# Altium PCB Mach do dong routed.PcbDoc (part 1 of 2)
Units mm, origin at the board's own origin, x right, y up, seen from the top; angles counter-clockwise.
Board outline 79.99 x 80 mm, 4 copper layers (Top Layer, Int1 (GND), Int2 (PWR), Bottom Layer), stack 1.566 mm thick; 97 components, 75 nets, 365 pads, 457 vias.
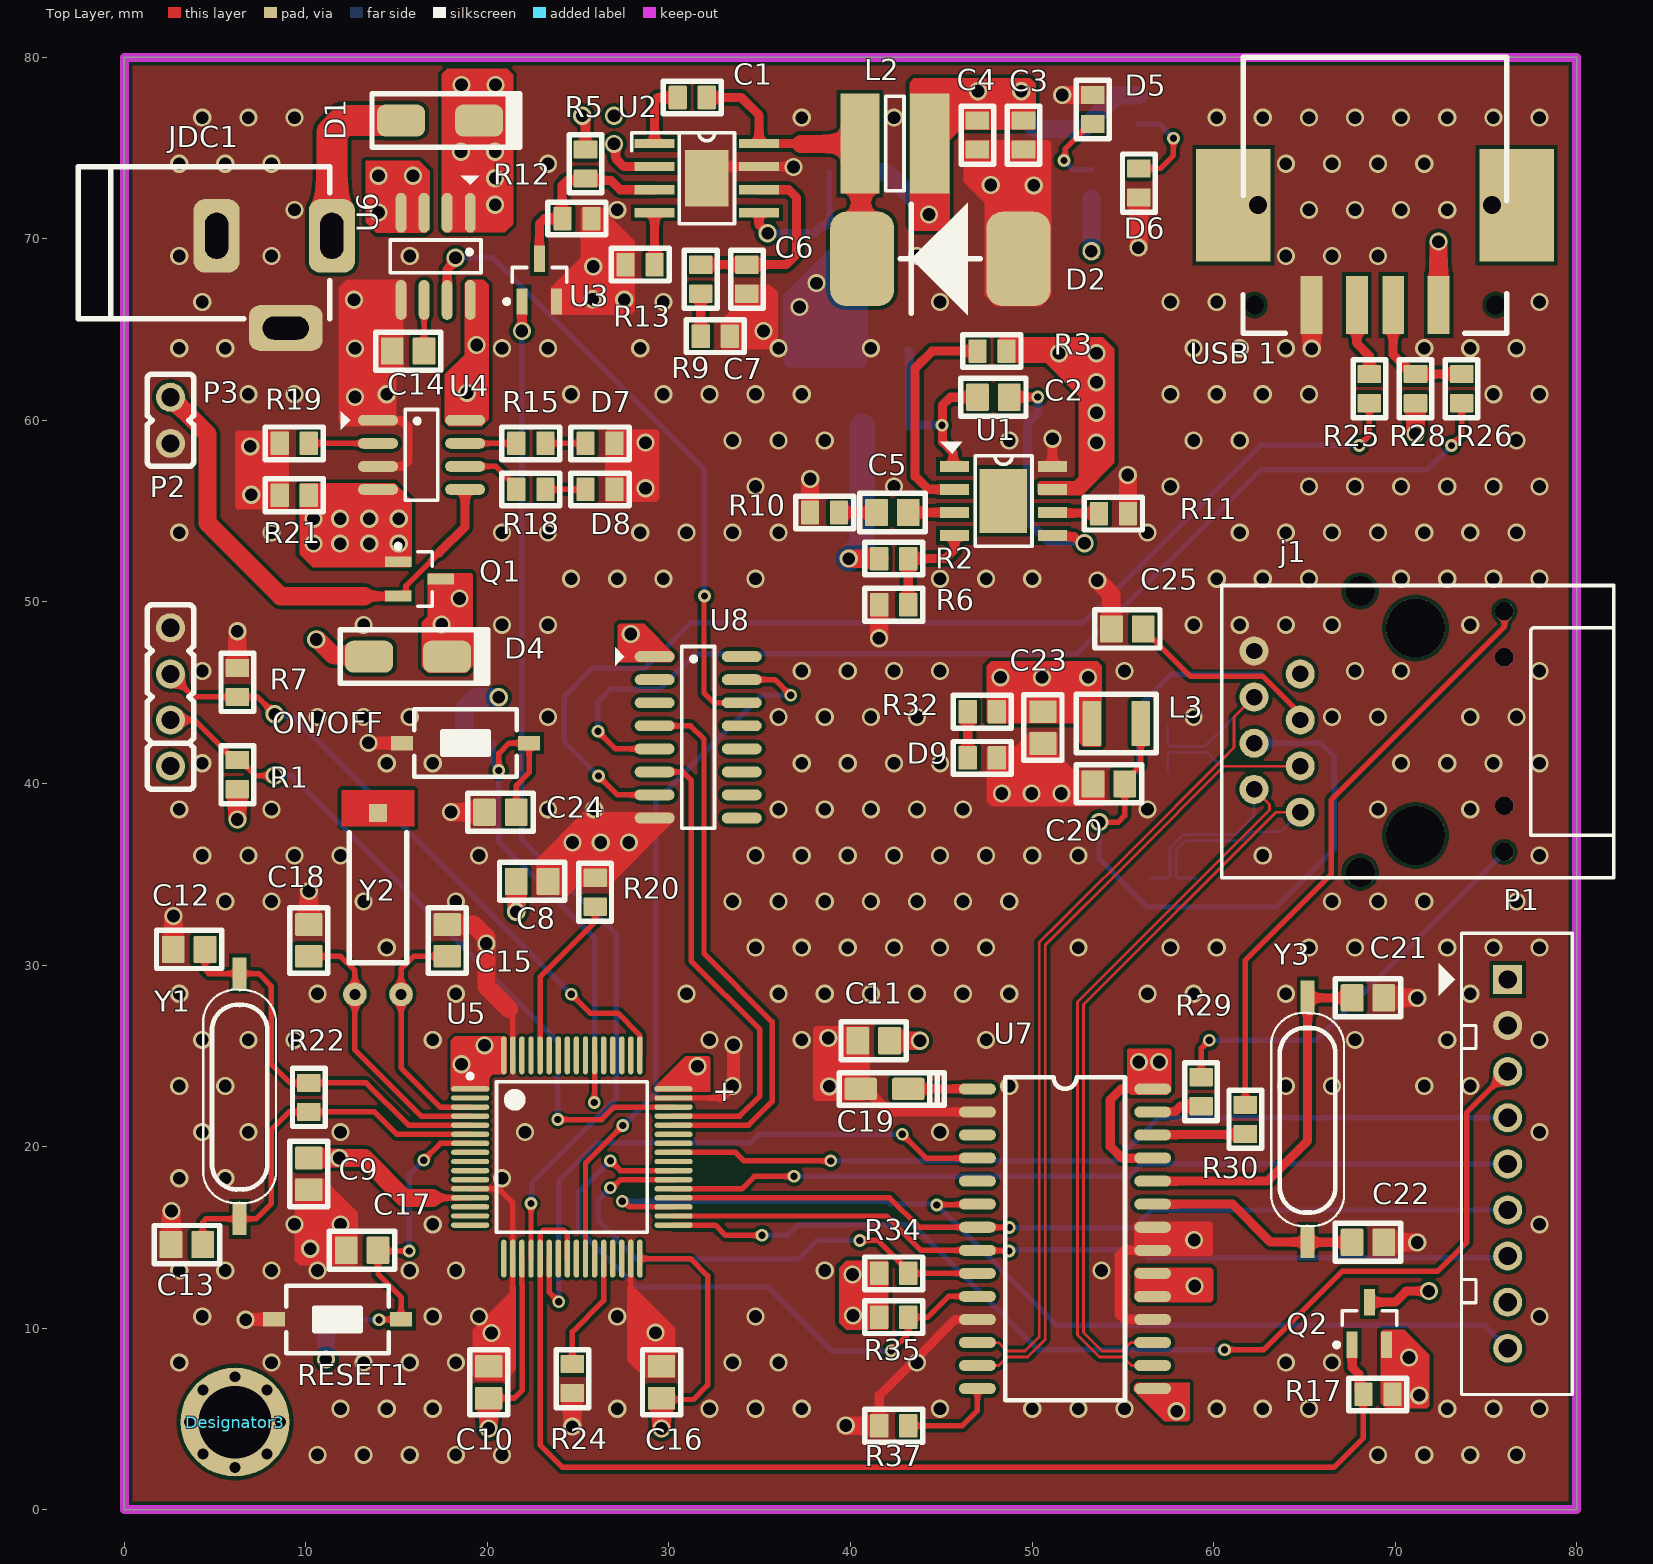
[diagram p0: Top Layer view]
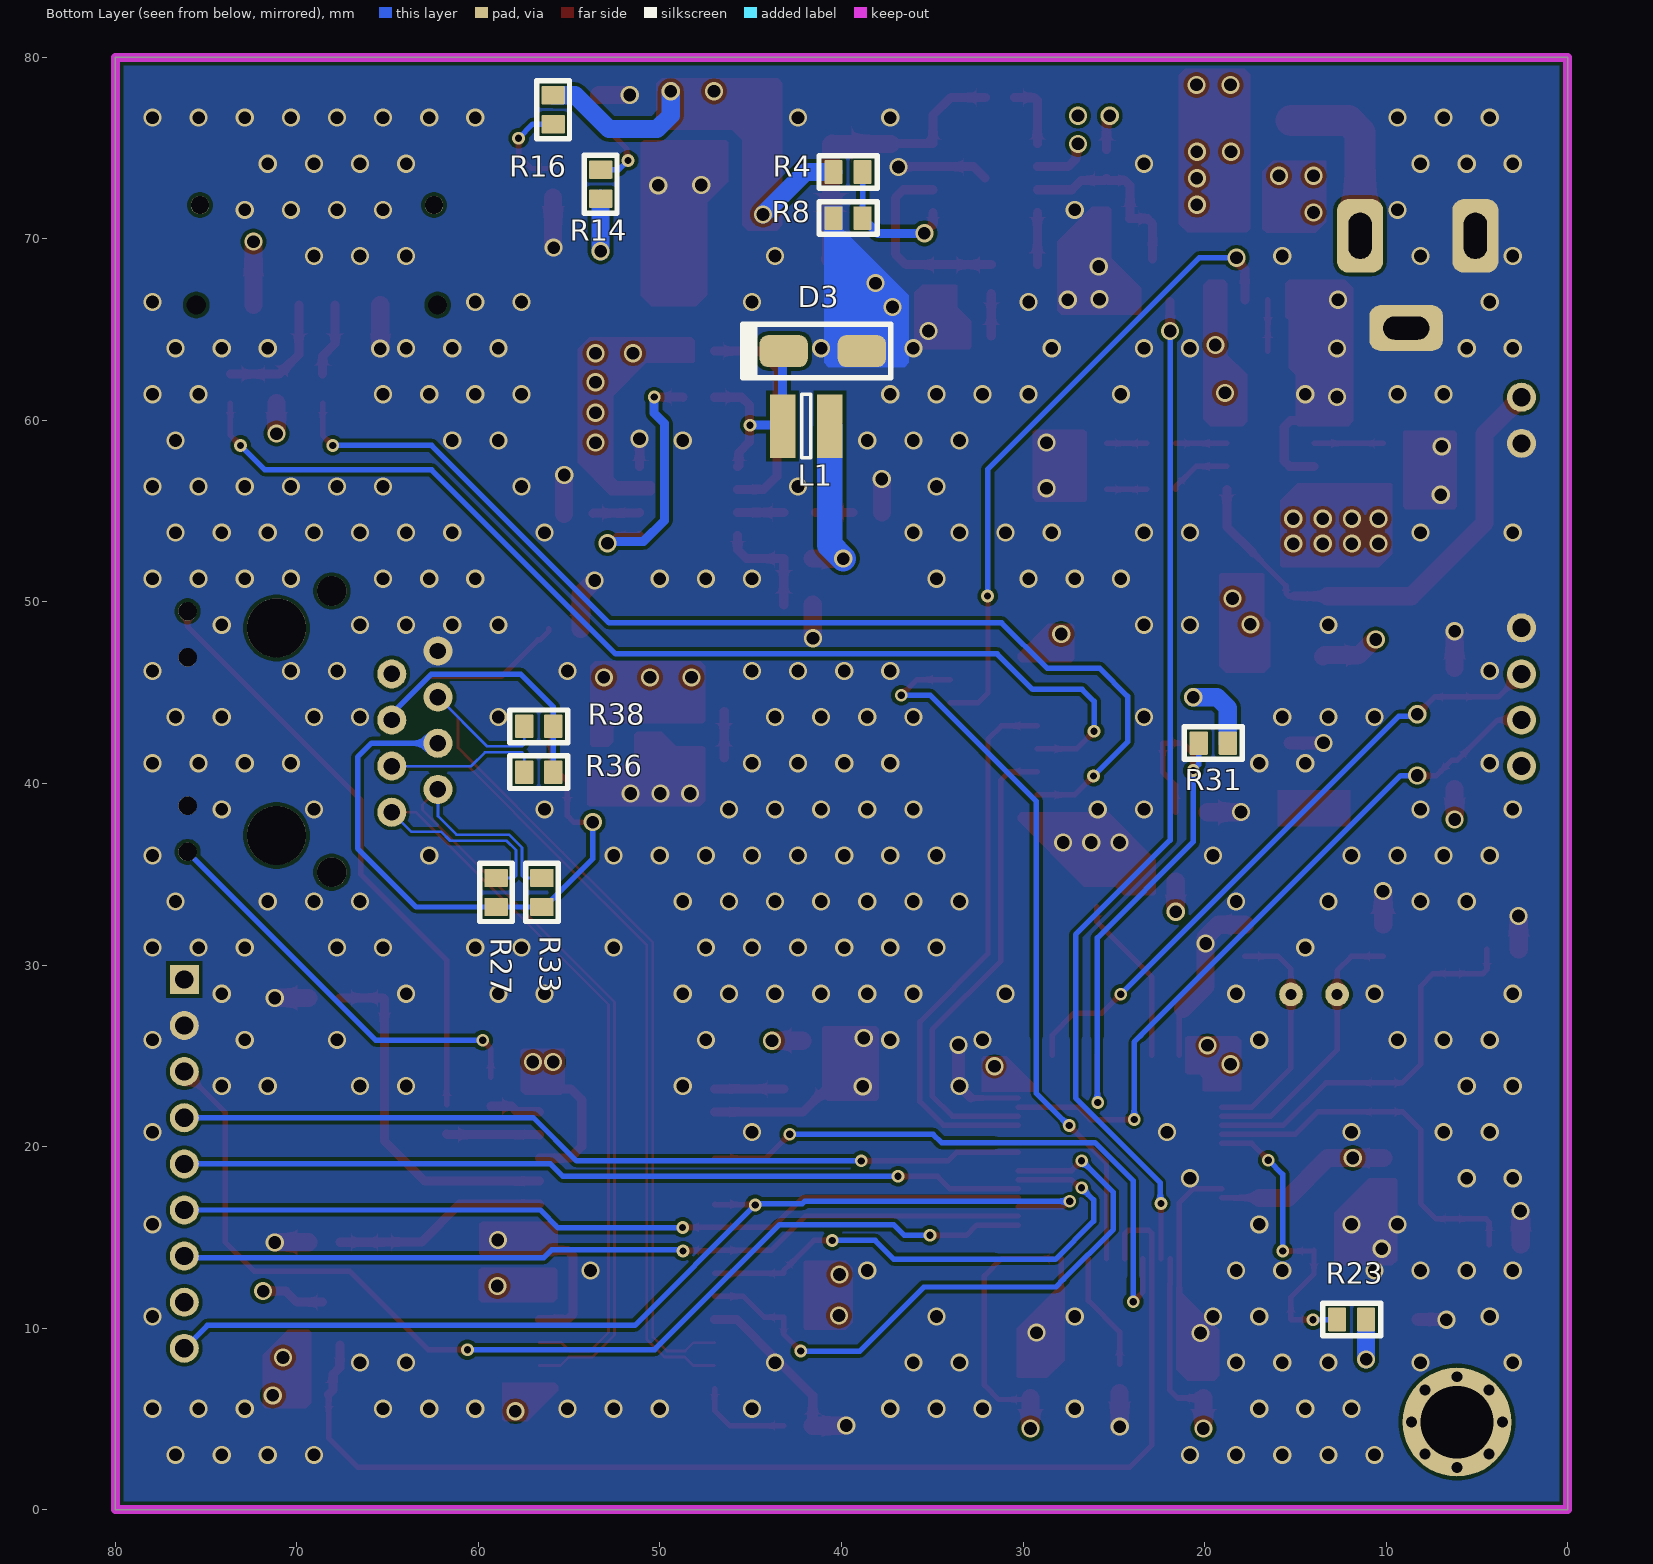
[diagram p1: Bottom Layer view, seen from below]
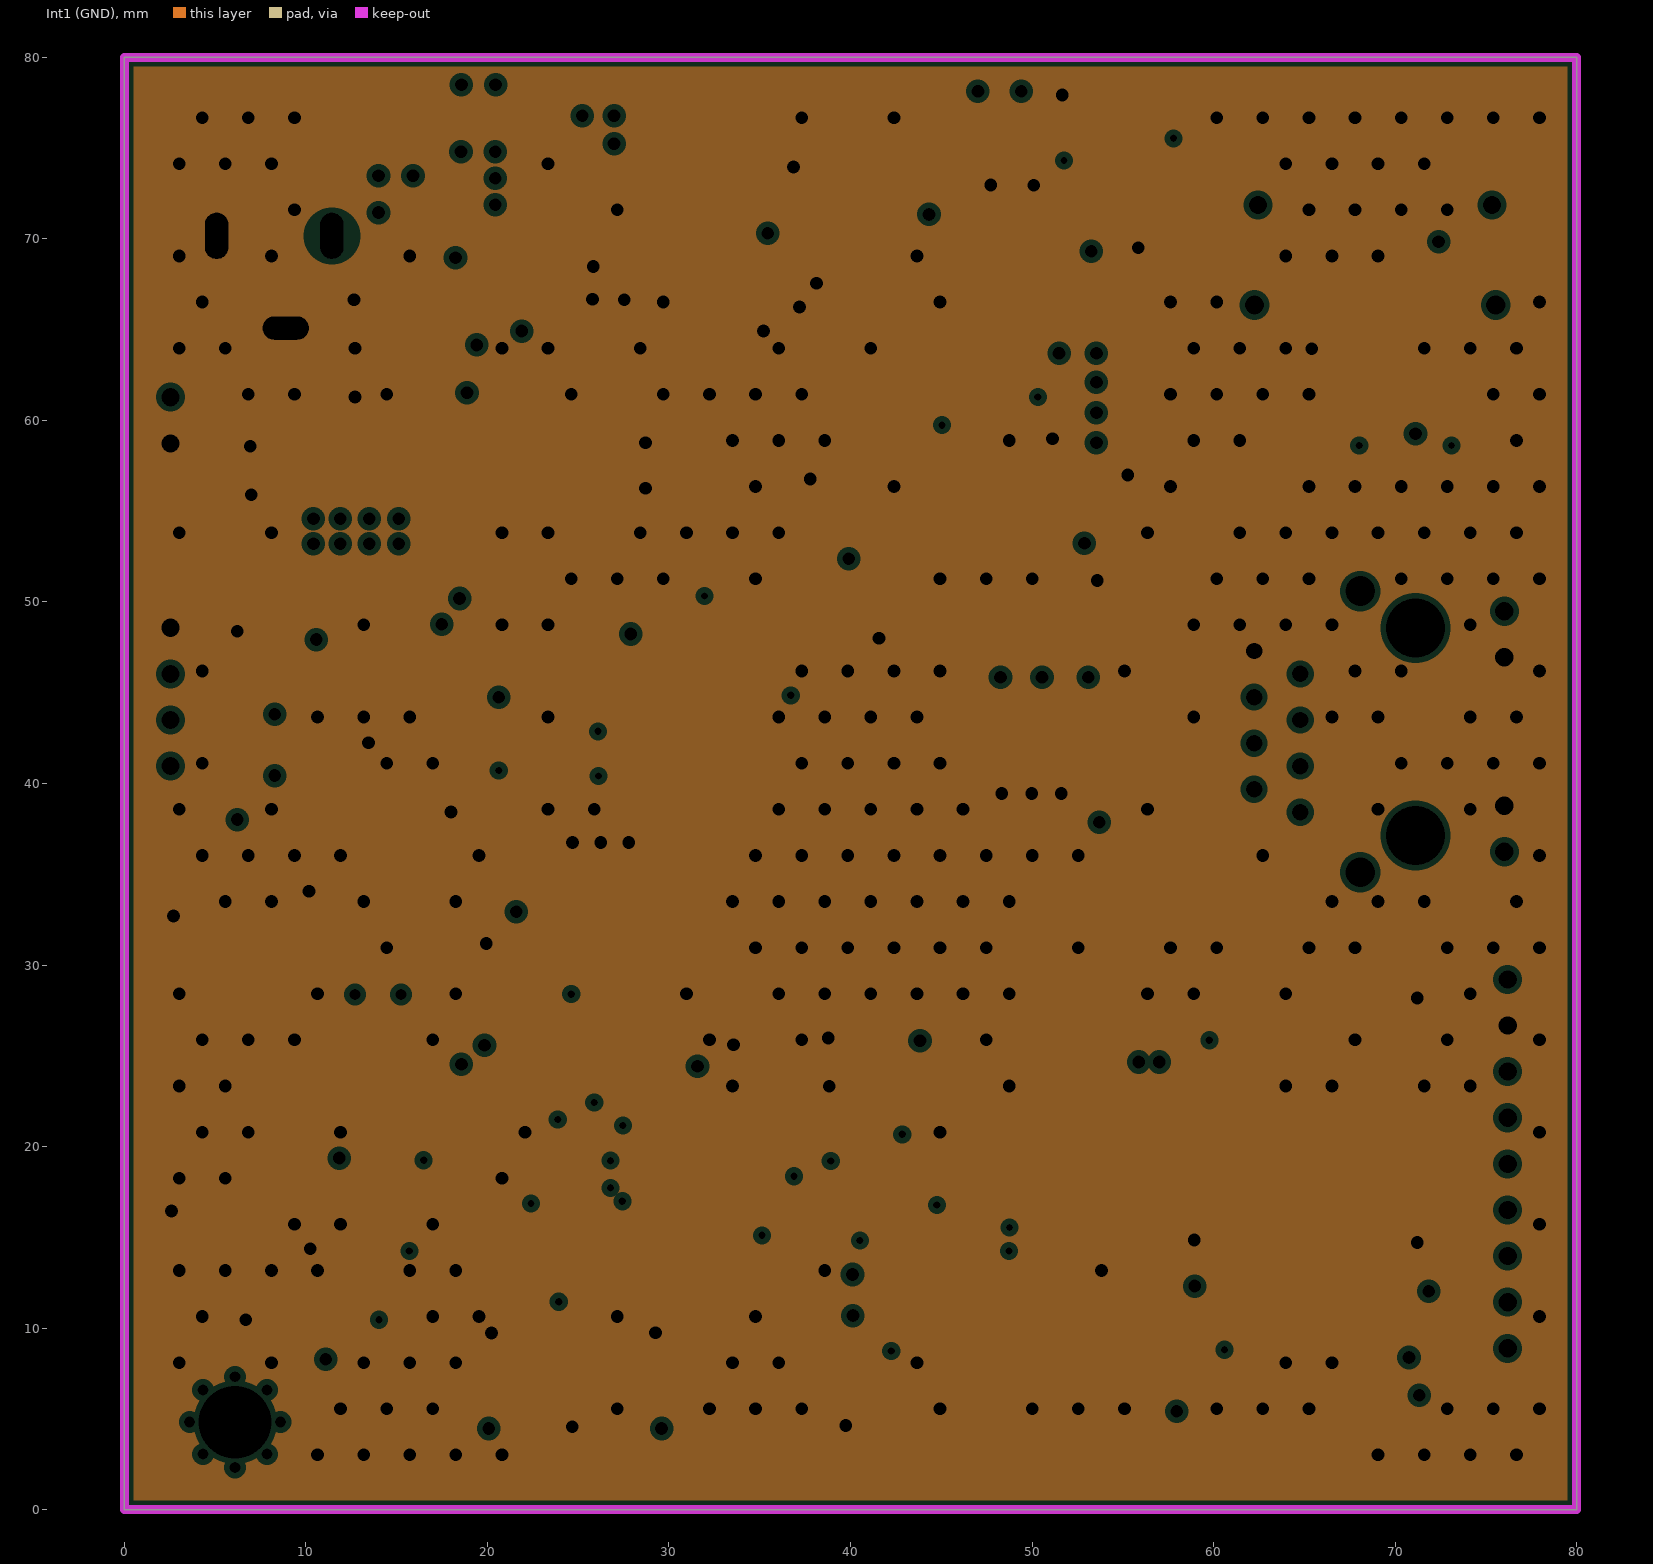
[diagram p2: Int1 (GND), clearances drawn from the general rule]
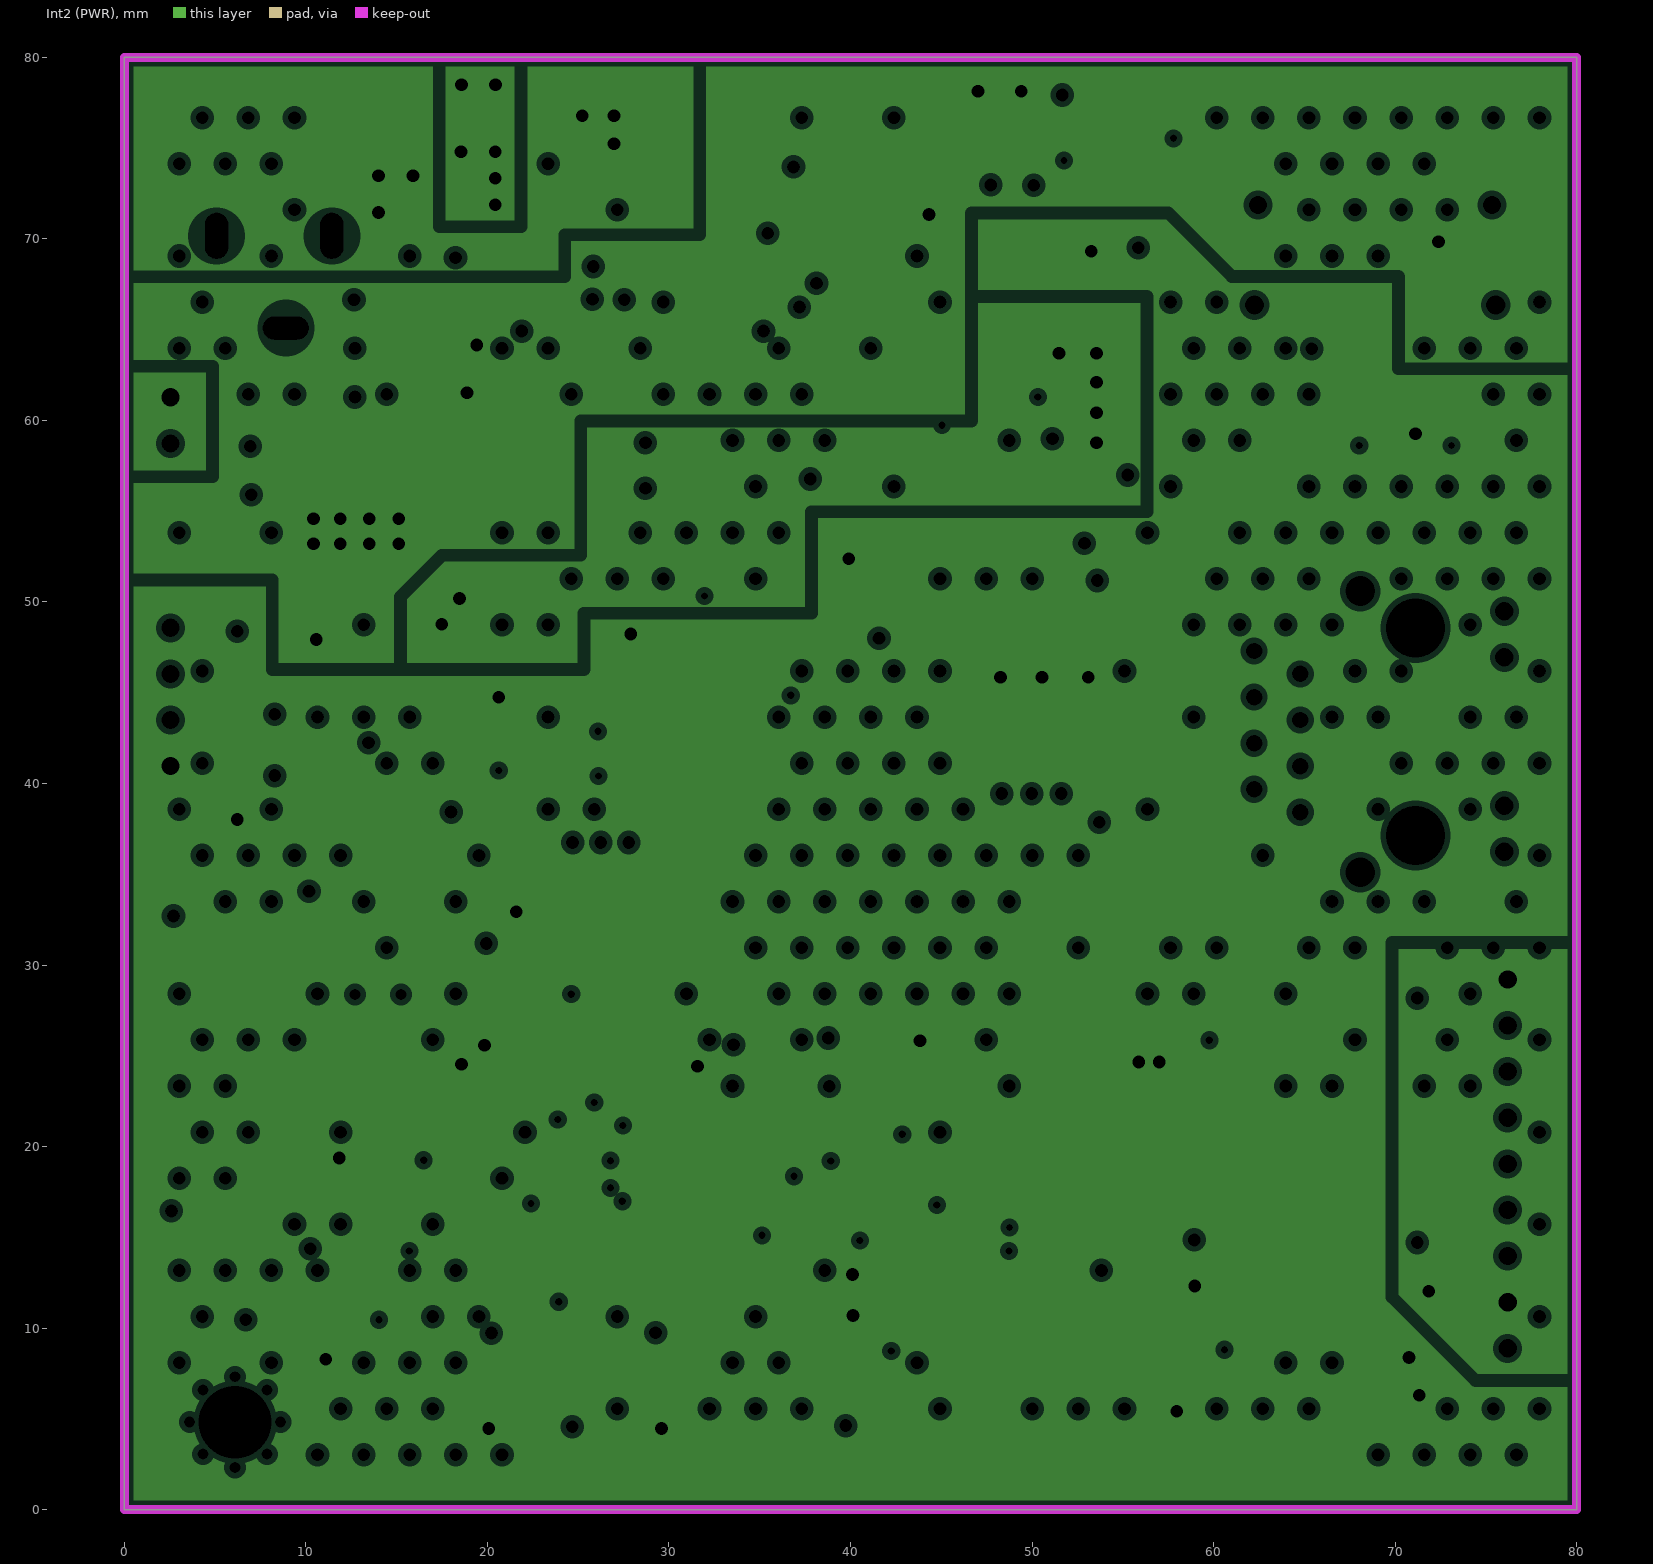
[diagram p3: Int2 (PWR), clearances drawn from the general rule]
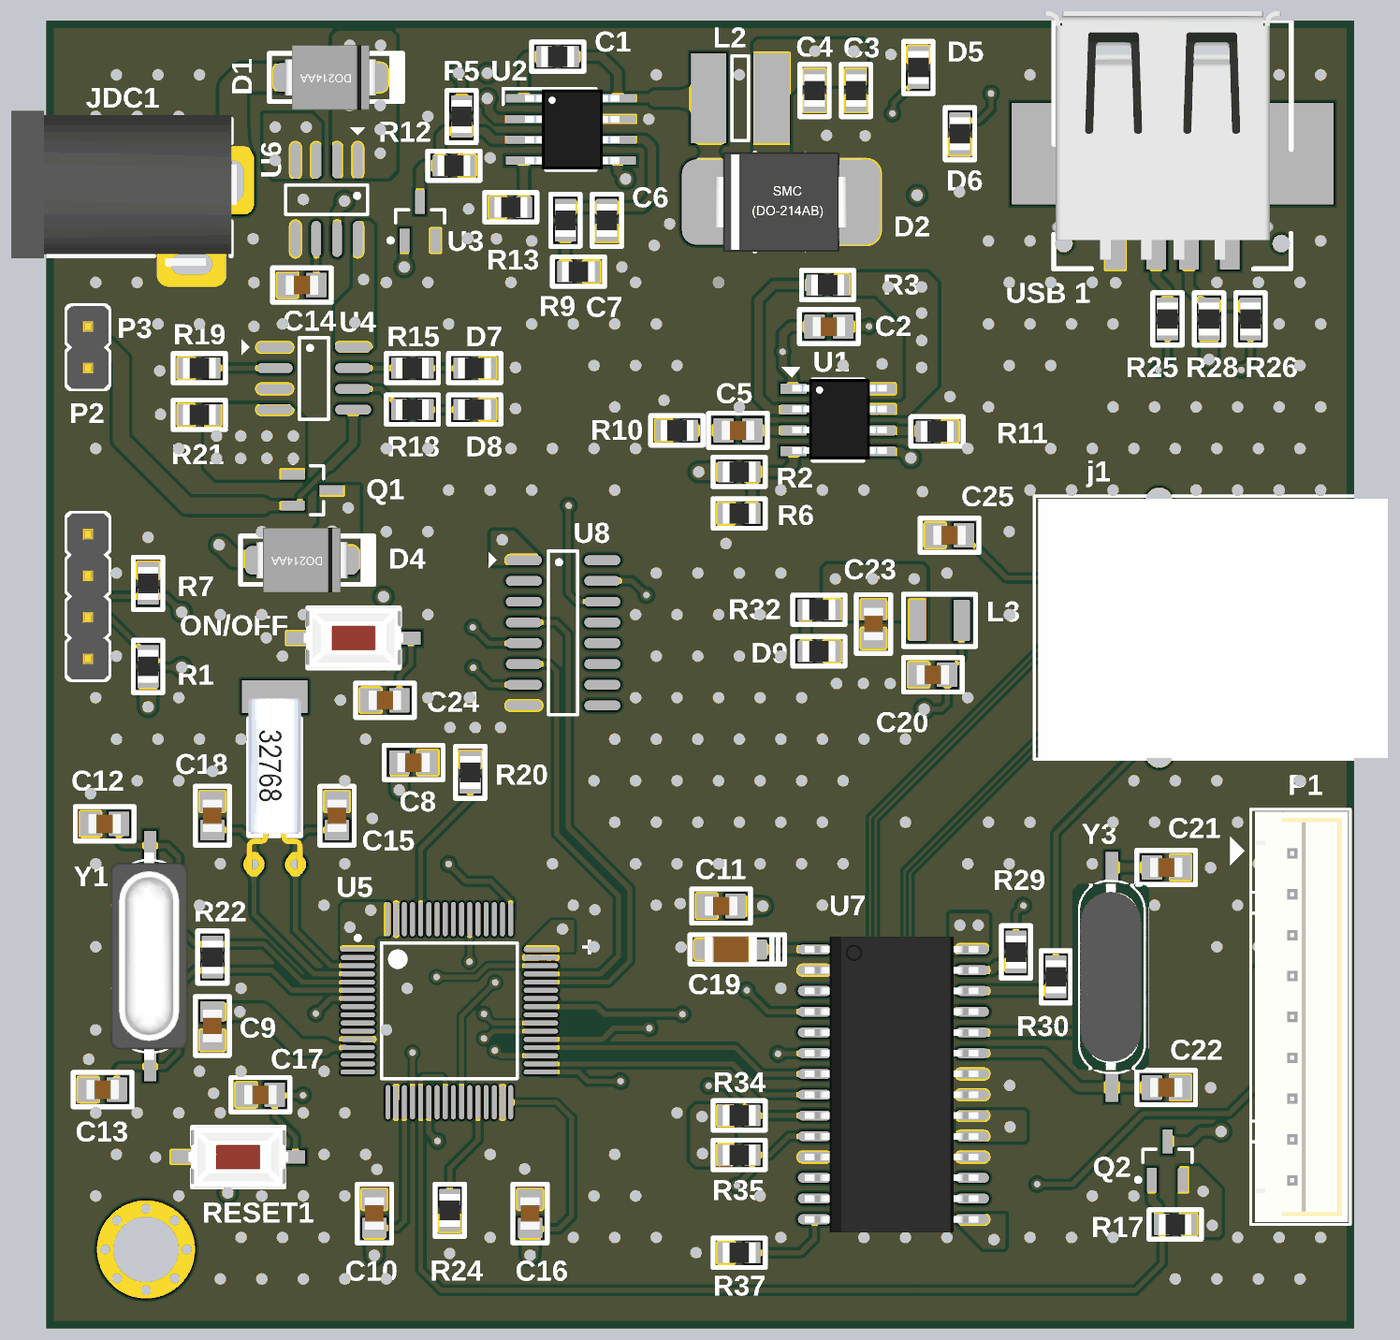
[diagram p5: 3D render of the assembled board from above, using the file's embedded part models]
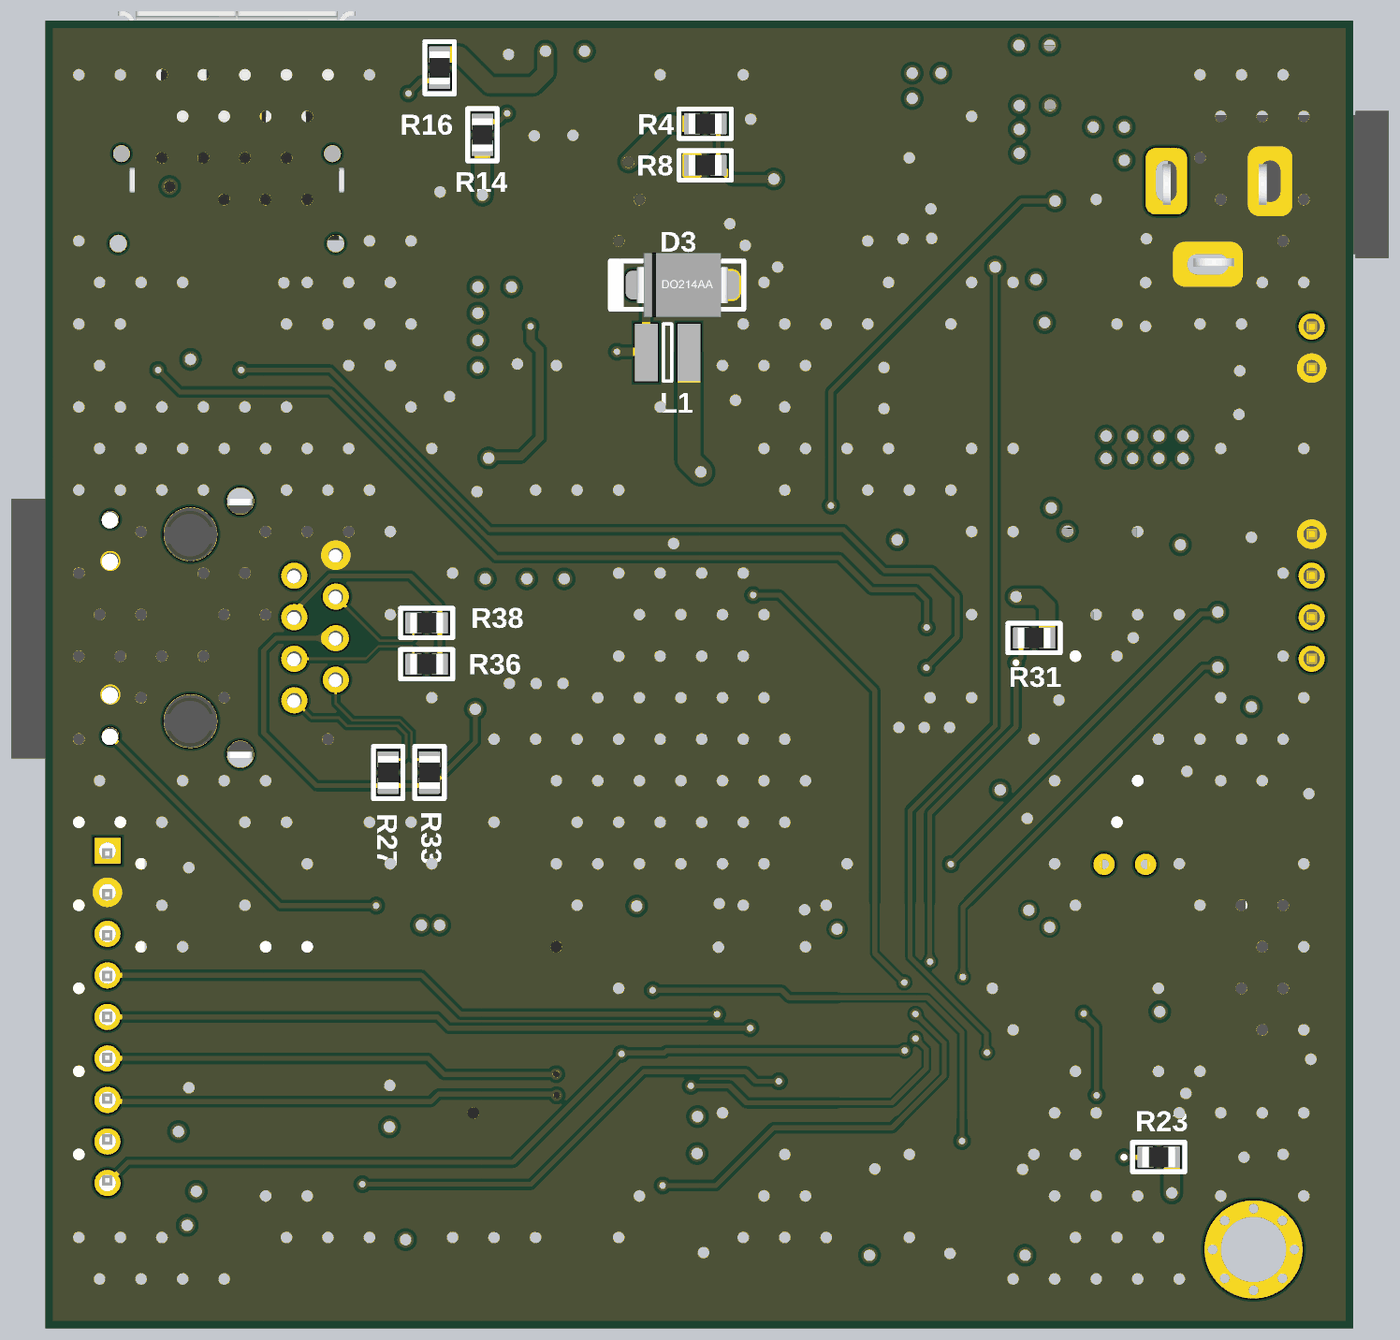
[diagram p6: 3D render of the assembled board from below, using the file's embedded part models]

## Layer stack, top to bottom
Top Solder: solder mask 0.0254, SM-001, Dk 4
Top Layer: signal copper 0.035
Dielectric 1: prepreg 0.203, PP-017, Dk 4.4
Int1 (GND): plane copper 0.03, net GND
Dielectric 3: core 1.03, Core-039, Dk 4.4
Int2 (PWR): plane copper 0.03, net (Multiple Nets)
Dielectric 5: prepreg 0.203, PP-017, Dk 4.4
Bottom Layer: signal copper 0.035
Bottom Solder: solder mask 0.0254, SM-001, Dk 4

## Board outline
0,0 0,79.999 79.995,79.999 79.995,0

## Design rules (kind name [scope] priority, off if disabled: settings)
Clearance Smaller [WithinRoom('STM32F103RCT6')] p1: gap=0.15 ignorepadtopadclearanceinfootprint=FALSE
Clearance [All] p2: gap=0.2 ignorepadtopadclearanceinfootprint=FALSE
DiffPairsRouting [All] p1: maxlimit=0.127 minlimit=0.127 mostfreqgap=0.127 toplayer_minwidth=0.15 toplayer_maxwidth=0.15 toplayer_prefwidth=0.15 bottomlayer_minwidth=0.15 bottomlayer_maxwidth=0.15 bottomlayer_prefwidth=0.15 impedanceprofiledriven=TRUE impedanceprofileid={F841B189-0D83-45DB-9989-EC143CD35575} impedanceprofilevalue=100.000000 maxuncoupledlength=12.7
HoleSize [All] p1: absolutevalues=TRUE maxlimit=4 minlimit=0.025 maxpercent=80.000 minpercent=20.000
MinimumSolderMaskSliver [All] p1: minsoldermaskwidth=0.2
PlaneClearance [All] p1: clearance=0.3
PlaneConnect [All] p1: planeconnectstyle=Relief reliefexpansion=0.2 reliefentries=4 reliefconductorwidth=0.3 reliefairgap=0.2
PolygonConnect PolygonConnect_ViaStiching [InNet('GND')] p1: connectstyle=Direct reliefconductorwidth=0.3 reliefentries=4 polygonreliefangle="90 Angle" airgapwidth=0.3
PolygonConnect [All] p2: connectstyle=Relief reliefconductorwidth=0.3 reliefentries=4 polygonreliefangle="90 Angle" airgapwidth=0.3
RoomDefinition STM32F103RCT6 [False vs False] p1: confinementstyle=ConfineIn formatcopy=TRUE lockcomponents=FALSE outline 17.856,26.111 32.334,26.111 32.334,12.7 17.856,12.7
RoutingVias [All] p1: holewidth=0.7 width=1 viastyle="Through Hole" minholewidth=0.4 minwidth=0.7 maxholewidth=0.7 maxwidth=1.1
SolderMaskExpansion [All] p1: expansion=0.102 istentingtop=FALSE
Width [All] p1: maxlimit=1.5 minlimit=0.15 preferedwidth=0.5
25 further rules are at their usual default settings.

## Classes and differential pairs
differential pair TPOUT_Ethernet: +TPOUT+ -TPOUT-
differential pair TPIN_Ethernet: +TPIN+ -TPIN-

## Components (designator, comment, footprint, x,y, rotation, side; value= is the part's Value field where it differs from the comment)
C1 "Cap" RESC2012(0805)#1 31.28,77.789 r180 top value=104
C2 "Cap" C0805-2012 47.865,61.279 r180 top value=100n
C3 "Cap" RESC2012(0805)#1 49.53,75.719 r270 top value=47uF
C4 "Cap" RESC2012(0805)#1 46.99,75.719 r270 top value=47uF
C5 "Cap" C0805-2012 42.305,54.929 r180 top value=220p
C6 "Cap" RESC2012(0805)#1 34.29,67.78 r270 top value=39p
C7 "Cap" RESC2012(0805)#1 32.55,64.643 r0 top value=6800pF
C8 "Cap" C0805-2012 22.465,34.609 r180 top value=104
C9 "Cap" C0805-2012 10.16,18.494 r270 top value=104
C10 "Cap" C0805-2012 20.066,7.02 r90 top value=104
C11 "Cap" C0805-2012 41.275,25.832 r0 top value=104
C12 "Cap" C0805-2012 3.57,30.861 r0 top value=20pF
C13 "Cap" C0805-2012 3.443,14.605 r0 top value=20pF
C14 "Cap" C0805-2012 15.635,63.819 r180 top value=1nF
C15 "Cap" C0805-2012 17.78,31.355 r270 top value=12pF
C16 "Cap" C0805-2012 29.591,7.02 r90 top value=104
C17 "Cap" C0805-2012 13.095,14.289 r180 top value=104
C18 "Cap" C0805-2012 10.16,31.355 r270 top value=12pF
C19 "Cap Pol1" CAP_TANTA_10UF_10V 41.87,23.179 r180 top value=10uF
C20 "Cap" C0805-2012 54.229,39.98 r0 top value=0.01uF
C21 "Cap" C0805-2012 68.5,28.194 r180 top value=18pF
C22 "Cap" C0805-2012 68.5,14.732 r180 top value=18pF
C23 "Cap" C0805-2012 50.597,43.081 r90 top value=0.1uF
C24 "Cap" C0805-2012 20.715,38.419 r180 top value=104
C25 "Cap" C0805-2012 55.245,48.514 r0 top value=0.01uF
D1 "SS34" SS14 17.39,76.519 r0 top
D2 "B560C" SS34 44.945,68.899 r180 top
D3 "SS34" SS14 41.03,63.819 r0 bottom
D4 "SS34" SS14 15.63,46.99 r0 top
D5 "LED0" RESC2012(0805)#1 53.34,77.127 r90 top
D6 "LED0" RESC2012(0805)#1 55.88,73.077 r270 top
D7 "LED0" RESC2012(0805)#1 26.2,58.739 r0 top
D8 "LED0" RESC2012(0805)#1 26.2,56.199 r0 top
D9 "LED0" RESC2012(0805)#1 47.257,41.416 r0 top
Designator3 "Comment" "Screw Hole 4mm" 6.096,4.826 r0 top
j1 "HR911105A" HR911105A 64.77,38.419 r270 top
JDC1 "Jac DC" DC-IN 8.255,67.629 r0 top
L1 "Inductor" "CD32 - 2.2uH 3.5x3.3MM" 40.64,59.69 r0 bottom value=2.2uH
L2 "Inductor" "L-8.2uH CD53 SMD" 42.438,75.249 r0 top value=8.2uH
L3 "Inductor" INDUCTOR_TOKO_1UH 54.635,43.307 r180 top value=10uH
ON/OFF "SW" SW-SMD 18.796,42.229 r180 top value="SW chip 2 pin"
P1 "Header 9" CON9 76.2,19.05 r270 top
P2 "Header 4" Header_4 2.54,44.769 r90 top
P3 "4.7V LI-ION" Header_2 2.54,60.009 r270 top
Q1 "IRLML6402" SOT-23_M 16.256,51.269 r0 top
Q2 "IRLML6402" SOT-23_M 68.58,10.255 r90 top
R1 "Res1" RESC2012(0805)#1 6.223,40.489 r90 top value=10K
R2 "Res1" RESC2012(0805)#1 42.38,52.389 r0 top value=120K
R3 "Res1" RESC2012(0805)#1 47.79,63.819 r0 top value=10K
R4 "Res1" RESC2012(0805)#1 39.637,73.685 r0 bottom value=53.6k
R5 "Res1" RESC2012(0805)#1 25.4,74.13 r90 top value=523K
R6 "Res1" RESC2012(0805)#1 42.38,49.849 r180 top value=39K
R7 "Res1" RESC2012(0805)#1 6.223,45.569 r90 top value=10K
R8 "Res1" RESC2012(0805)#1 39.637,71.145 r180 bottom value=10.2k
R9 "Res1" RESC2012(0805)#1 31.75,67.78 r90 top value=13K
R10 "Res1" RESC2012(0805)#1 38.57,54.929 r180 top value=68K
R11 "Res1" RESC2012(0805)#1 54.483,54.864 r0 top value=200K
R12 "Res1" RESC2012(0805)#1 24.93,71.12 r180 top value=84.5K
R13 "Res1" RESC2012(0805)#1 28.41,68.58 r0 top value=163K
R14 "Res1" RESC2012(0805)#1 53.264,73.012 r270 bottom value=330
R15 "Res1" RESC2012(0805)#1 22.39,58.739 r180 top value=1K
R16 "Res1" RESC2012(0805)#1 55.88,77.116 r90 bottom value=1K
R17 "Res1" RESC2012(0805)#1 69.05,6.35 r0 top value=20K
R18 "Res1" RESC2012(0805)#1 22.39,56.199 r180 top value=1K
R19 "Res1" RESC2012(0805)#1 9.36,58.739 r0 top value=1.2K
R20 "Res1" RESC2012(0805)#1 25.933,34.011 r270 top value=10K
R21 "10K" RESC2012(0805)#1 9.36,55.88 r180 top
R22 "Res1" RESC2012(0805)#1 10.16,22.709 r90 top value=1M
R23 "Res1" RESC2012(0805)#1 11.9,10.479 r180 bottom value=10K
R24 "Res1" RESC2012(0805)#1 24.679,7.22 r90 top value=10K
R25 "Res1" RESC2012(0805)#1 68.58,61.749 r90 top value=22R
R26 "Res1" RESC2012(0805)#1 73.66,61.749 r90 top value=22R
R27 "Res1" RESC2012(0805)#1 59.025,34 r90 bottom value=50
R28 "Res1" RESC2012(0805)#1 71.12,61.749 r90 top value=1K5
R29 "Res1" RESC2012(0805)#1 59.309,23.025 r270 top value=1K
R30 "Res1" RESC2012(0805)#1 61.747,21.501 r270 top value=1K
R31 "Res1" RESC2012(0805)#1 19.52,42.229 r180 bottom value=10K
R32 "Res1" RESC2012(0805)#1 47.257,43.956 r0 top value=220
R33 "Res1" RESC2012(0805)#2 56.5,34 r270 bottom value=50
R34 "Res1" RESC2012(0805)#1 42.38,13.019 r180 top value=10K
R35 "Res1" RESC2012(0805)#1 42.38,10.606 r180 top value=10K
R36 "Res1" RESC2012(0805)#1 56.675,40.625 r0 bottom value=50
R37 "Res1" RESC2012(0805)#1 42.38,4.623 r180 top value=2.7K
R38 "Res1" RESC2012(0805)#1 56.675,43.15 r180 bottom value=50
RESET1 "SW" SW-SMD 11.74,10.479 r180 top value="SW chip 2 pin"
U1 "MP1584EN-LF-Z" MP1584EN-LF-Z 45.72,57.469 r0 top
U2 "TPS54360" TPS54360 29.21,75.249 r0 top
U3 "PDTC114EU" SOT-23_M 22.86,67.724 r90 top
U4 "TP4056" SO-8 16.37,58.104 r0 top
U5 "STM32F103RCT6" LQFP64_M 24.65,19.429 r0 top
U6 "ACS712" SO-8 17.145,69.039 r270 top
U7 "ENC28J60" SOL-28 46.99,23.179 r0 top
U8 "74HC4050" SO-16 31.61,42.545 r0 top
"USB 1" "USB" "USB type A female" 72.39,66.359 r180 top
Y1 "8MHZ" Xtal-smd 6.35,22.773 r270 top
Y2 "32,768K" CR_32768 13.97,28.386 r0 top
Y3 "25MHZ" Xtal-smd 65.176,21.503 r270 top

## Footprints (in the part's own frame and the unit in brackets; to place one, negate y for a bottom-side part, rotate by r counter-clockwise, add the part's x,y. Pads: shape width x height; smd on the part's side, far side on the other; paste and mask are expansions set on the pad)
C0805-2012 [mm] "Chip Capacitor, 2-Leads, Body 2.0x1.3mm, IPC Medium Density"
  rrect10% 1.25x1.5 smd: 1(-0.875,0) 2(0.875,0)
  silkscreen extent -1.8,-1.05 1.8,1.05, body extent -1,-0.6 1,0.6, height 0.95
CAP_TANTA_10UF_10V [mm] "CAP TANTALUM TCJA 3216-18 1206 Body 3.2x1.6mm"
  rrect20% 1.8x1.23 smd: 1(-1.31,0) 2(1.31,0)
  silkscreen extent -3.3,-0.9 2.5,0.9, body extent -1.6,-0.8 1.6,0.8, height 1
"CD32 - 2.2uH 3.5x3.3MM" [mm]
  rect 1.4x3.5 smd: 1(0,0) 2(2.6,0)
  silkscreen extent 1.05,-1.75 1.55,1.75
CON9 [mm] "CON9"
  rect 1.6x1.6 hole 1 mask+0.1: 1(-10.16,0)
  round 1.6 hole 1 mask+0.1: 2(-7.62,0) 3(-5.08,0) 4(-2.54,0) 5(0,0) 6(2.54,0) 7(5.08,0) 8(7.62,0) 9(10.16,0)
  silkscreen extent -12.7,-3.8 12.7,3.56, body extent -12.55,-2.29 12.55,3.41, height 7
CR_32768 [mm] "32.768 KHz LOW FREQUENCY CYLINDRICALWATCH CRYSTAL"
  rrect10% 1x1 smd mask+0.1: 0(0,10)
  round 1.3 hole 0.6 mask+0.1: 1(-1.27,0) 2(1.27,0)
  Top Layer region: -2,9.25 -2,11.25 2,11.25 2,9.25
  silkscreen extent -1.59,1.75 1.59,8.9, body extent -1.73,-0.6 1.73,10.18, height 3.2
DC-IN [mil] "Jac DC input"
  rrect50% 100x160 hole 50 slot 100 at 90 deg: 1(125,100) 2(-125,100)
  rrect50% 160x100 hole 50 slot 100 at 0 deg: 3(25,-100)
  silkscreen extent -425,-80 120,250, body extent -410,-105 134,269, height 434
Header_2 [mm] "Connector DIP, 2Pin_2.54mm"
  round 1.6 hole 1 mask+0.1: 1(-1.27,0) 2(1.27,0)
  silkscreen extent -2.54,-1.28 2.54,1.28, body extent -2.54,-1.27 2.54,1.27, height 10.1
Header_4 [mm] "Connector DIP, 4Pin_2.54mm"
  round 1.6 hole 1 mask+0.1: 1(-3.81,0) 2(-1.27,0) 3(1.27,0) 4(3.81,0)
  silkscreen extent -5.08,-1.28 5.08,1.28, body extent -5.08,-1.27 5.08,1.27, height 10.1
HR911105A [mm]
  round 1.63 hole 1.63: 0(-12.185,3.3) 0(3.305,3.3)
  round 3.25 hole 3.25: 0(-10.155,6.35) 0(1.275,6.35)
  round 1.6 hole 0.9: 1(0,0) 2(-1.26,-2.54) 3(-2.54,0) 4(-3.8,-2.54) 5(-5.08,0) 6(-6.34,-2.54) 7(-7.62,0) 8(-8.88,-2.54)
  round 1.02 hole 1.02: 9(2.185,11.25) 10(-0.355,11.25) 11(-8.525,11.25) 12(-11.065,11.25)
  silkscreen extent -12.49,-4.33 3.61,17.27, body extent -12.32,-4.1 3.56,17.3, height 13.8
INDUCTOR_TOKO_1UH [mm] "DFE322512C, 3.2x2.5x1mm"
  rrect10% 1x2.5 smd mask+0.1: 1(-1.35,0) 2(1.35,0)
  silkscreen extent -2.2,-1.6 2.2,1.6
"L-8.2uH CD53 SMD" [mm]
  rect 2.15x5.5 smd: 1(-1.925,0) 2(1.925,0)
  silkscreen extent -0.51,-2.6 0.51,2.6
LQFP64_M [mm] "Thin QFP, 64-Leads, Body 10x10mm, Pitch 0.5mm, IPC Low Density"
  oval 2.1x0.3 smd: 1(-5.6,3.75) 2(-5.6,3.25) 3(-5.6,2.75) 4(-5.6,2.25) 5(-5.6,1.75) 6(-5.6,1.25) 7(-5.6,0.75) 8(-5.6,0.25) 9(-5.6,-0.25) 10(-5.6,-0.75) 11(-5.6,-1.25) 12(-5.6,-1.75) 13(-5.6,-2.25) 14(-5.6,-2.75) 15(-5.6,-3.25) 16(-5.6,-3.75) 33(5.6,-3.75) 34(5.6,-3.25) 35(5.6,-2.75) 36(5.6,-2.25) 37(5.6,-1.75) 38(5.6,-1.25) 39(5.6,-0.75) 40(5.6,-0.25) 41(5.6,0.25) 42(5.6,0.75) 43(5.6,1.25) 44(5.6,1.75) 45(5.6,2.25) 46(5.6,2.75) 47(5.6,3.25) 48(5.6,3.75)
  oval 0.3x2.1 smd: 17(-3.75,-5.6) 18(-3.25,-5.6) 19(-2.75,-5.6) 20(-2.25,-5.6) 21(-1.75,-5.6) 22(-1.25,-5.6) 23(-0.75,-5.6) 24(-0.25,-5.6) 25(0.25,-5.6) 26(0.75,-5.6) 27(1.25,-5.6) 28(1.75,-5.6) 29(2.25,-5.6) 30(2.75,-5.6) 31(3.25,-5.6) 32(3.75,-5.6) 49(3.75,5.6) 50(3.25,5.6) 51(2.75,5.6) 52(2.25,5.6) 53(1.75,5.6) 54(1.25,5.6) 55(0.75,5.6) 56(0.25,5.6) 57(-0.25,5.6) 58(-0.75,5.6) 59(-1.25,5.6) 60(-1.75,5.6) 61(-2.25,5.6) 62(-2.75,5.6) 63(-3.25,5.6) 64(-3.75,5.6)
  silkscreen extent -5.72,-4.15 4.15,4.57, body extent -5,-5 5,5, height 1.6
MP1584EN-LF-Z [mm]
  rect 2.62x3.51 smd mask+0: 0(2.7,-1.905)
  rect 1.6x0.61 smd: 1(0,0) 2(0,-1.27) 3(0,-2.54) 4(0,-3.81) 5(5.4,-3.81) 6(5.4,-2.54) 7(5.4,-1.27) 8(5.4,0)
  silkscreen extent -0.77,-4.41 4.27,1.35, body extent -0.09,-4.31 5.69,0.59, height 1.45
RESC2012(0805)#1 [mm] "Chip Resistor, Body 2.0x1.3mm, 1/8W 0805"
  rrect10% 1x1.3 smd: 1(-0.8,0) 2(0.8,0)
  silkscreen extent -1.6,-0.9 1.6,0.9, body extent -1,-0.62 1,0.63, height 0.6
RESC2012(0805)#2 [mm] "Chip Resistor, Body 2.0x1.3mm, 1/8W 0805"
  rrect10% 1x1.3 smd: 1(-0.8,0) SS(0.8,0)
  silkscreen extent -1.6,-0.9 1.6,0.9, body extent -1,-0.63 1,0.62, height 0.6
"Screw Hole 4mm" [mm]
  round 6 hole 4: 1(0,0)
  round 0.6 hole 0.6: ""(-2.5,0) ""(-1.768,-1.768) ""(-1.768,1.768) ""(0,-2.5) ""(0,2.5) ""(1.768,-1.768) ""(1.768,1.768) ""(2.5,0)
SO-8 [mm] "8-Pin Small Outline Integrated Circuit 1.27 mm Pitch, IPC Medium Density"
  oval 2.2x0.6 smd: 1(-2.4,1.905) 2(-2.4,0.635) 3(-2.4,-0.635) 4(-2.4,-1.905) 5(2.4,-1.905) 6(2.4,-0.635) 7(2.4,0.635) 8(2.4,1.905)
  silkscreen extent -4.44,-2.5 0.9,2.5, body extent -1.95,-2.45 1.95,2.45, height 1.75
SO-16 [mm] "SOIC, 16-Leads, Body 9.9x3.9mm, Pitch 1.27mm, IPC Medium Density"
  oval 2.2x0.6 smd: 1(-2.4,4.445) 2(-2.4,3.175) 3(-2.4,1.905) 4(-2.4,0.635) 5(-2.4,-0.635) 6(-2.4,-1.905) 7(-2.4,-3.175) 8(-2.4,-4.445) 9(2.4,-4.445) 10(2.4,-3.175) 11(2.4,-1.905) 12(2.4,-0.635) 13(2.4,0.635) 14(2.4,1.905) 15(2.4,3.175) 16(2.4,4.445)
  silkscreen extent -4.57,-5 0.9,5, body extent -1.95,-4.95 1.95,4.95, height 1.75
SOL-28 [mil]
  oval 80x24 smd: 1(0,0) 2(0,-50) 3(0,-100) 4(0,-150) 5(0,-200) 6(0,-250) 7(0,-300) 8(0,-350) 9(0,-400) 10(0,-450) 11(0,-500) 12(0,-550) 13(0,-600) 14(0,-650) 15(380,-650) 16(380,-600) 17(380,-550) 18(380,-500) 19(380,-450) 20(380,-400) 21(380,-350) 22(380,-300) 23(380,-250) 24(380,-200) 25(380,-150) 26(380,-100) 27(380,-50) 28(380,0)
  silkscreen extent 60,-675 320,25, body extent -23,-681 394,31, height 99
SOT-23_M [mm] "SOT23, 3-Leads, Body 2.9x1.3mm, Pitch 0.95mm, Lead Span 2.5mm, IPC Low Density"
  rect 1.45x0.6 smd: 1(-1.175,0.95) 2(-1.175,-0.95) 3(1.175,0)
  silkscreen extent -1.3,-1.5 0.7,1.92, body extent -0.7,-1.5 0.7,1.5, height 1.1
SS14 [mm] "Diode SMD"
  rrect50% 2.65x1.75 smd: 1(-2.15,0) 2(2.15,0)
  silkscreen extent -3.75,-1.48 4.4,1.48, body extent -2.79,-1.98 2.79,1.97, height 2.6
SS34 [mm] "DIODE SMD DO-214AB"
  rrect50% 3.52x5.2 smd mask+0.1: 1(-4.305,0) 2(4.305,0)
  silkscreen extent -2.2,-3.1 2.2,3.1, body extent -4.07,-3.05 4.06,3.05, height 2.4
SW-SMD [mm] "Switch SMD type"
  rect 1.2x0.8 smd: 1(-3.5,0) 2(3.5,0)
  silkscreen extent -2.82,-1.85 2.82,1.85, body extent -3.05,-1.85 3.05,1.85, height 2.5
TPS54360 [mm]
  rect 2.2x0.5 smd mask+0.07: 1(0,0) 2(0,-1.27) 3(0,-2.54) 4(0,-3.81) 5(5.75,-3.81) 6(5.75,-2.54) 7(5.75,-1.27) 8(5.75,0)
  rect 2.4x3.1 smd mask+0: 9(2.875,-1.905)
  silkscreen extent -1.27,-4.41 4.4,0.6, body extent 0.06,-4.36 5.84,0.55, height 1.45
"USB type A female" [mm]
  rect 4.1x6.2 smd: 0(-4.3,-5.5) 0(11.3,-5.5)
  round 1 hole 1.05: 0(-3.15,0) 0(10.15,0)
  round 1 hole 1: 0(-2.95,-5.5) 0(9.95,-5.5)
  rect 1.2x3.2 smd: 1(0,0) 2(2.5,0) 3(4.5,0) 4(7,0)
  silkscreen extent -3.75,-13.65 10.77,1.55, body extent -3.14,-14.22 11.36,0.98, height 7.36
Xtal-smd [mil] "Footpin for Crystal 2 pin"
  rect 70x30 smd: 1(266,0) 2(-266,0)
  silkscreen extent -231,-79 232,79, body extent -250,-95 250,90, height 165

## Part data
C1 C2 C3 C4 C5 C6 C7 C8 C9 C10 C11 C12 C13 C14 C15 C16 C17 C18 C20 C21 C22 C23 C24 C25: "Capacitor", LatestRevisionDate=17-Jul-2002, LatestRevisionNote="Re-released for DXP Platform.", PackageReference=RAD-0.3, Published=8-Jun-2000, Publisher="Altium Limited"
  C2 C5 C8 C9 C10 C11 C12 C13 C14 C15 C16 C17 C18 C20 C21 C22 C23 C24 C25: PackageDescription="Radial Cap, Thru-Hole; 2 Leads; 0.3 in Pin Spacing"
C19: "Polarized Capacitor (Radial)", LatestRevisionDate=17-Jul-2002, LatestRevisionNote="Re-released for DXP Platform.", PackageDescription="Polarized Capacitor (Radial); 2 Leads", PackageReference=RB7.6-15, Published=8-Jun-2000, Publisher="Altium Limited"
D1 D3 D4: library part "D Schottky", "Schottky Diode", Code_JEDEC=DO-214-AA, LatestRevisionDate=17-Jul-2002, LatestRevisionNote="Re-released for DXP Platform.", PackageDescription="DO-214-AA/SMB; 2 C-Bend Leads; Body 5.3 x 3.6 mm, inc. leads (LxW)", PackageReference=SMB, Published=8-Jun-2000, Publisher="Altium Limited"
D2: library part "D Zener", "Zener Diode", LatestRevisionDate=17-Jul-2002, LatestRevisionNote="Re-released for DXP Platform.", PackageReference=DIODE-0.7, Published=8-Jun-2000, Publisher="Altium Limited"
D5 D6 D7 D8 D9: "Typical INFRARED GaAs LED", LatestRevisionDate=08-Jul-2005, LatestRevisionNote="Mech Layer 1 removed.", PackageDescription="LED; 2 Leads", PackageReference=LED-0, Published=8-Jun-2000, Publisher="Altium Limited"
j1: "Ethernet Connector"
JDC1: library part DCIN, "Jac DC input"
ON/OFF RESET1: library part SW2, "Switch button 2 pin"
P1: "Header, 9-Pin", LatestRevisionDate=17-Jul-2002, LatestRevisionNote="Re-released for DXP Platform.", Publisher="Altium Limited"
P2: "Header, 4-Pin", LatestRevisionDate=17-Jul-2002, LatestRevisionNote="Re-released for DXP Platform.", Publisher="Altium Limited"
P3: library part "Header 2", "Header, 2-Pin", LatestRevisionDate=17-Jul-2002, LatestRevisionNote="Re-released for DXP Platform.", Publisher="Altium Limited"
Q1 Q2: library part 8#IRLML9301TRPBF, "MOSFET MOSFT P-Ch -60V -15A", Case/Package=SOT-23, Continuous Drain Current (ID)=3.6A, Drain to Source Breakdown Voltage=-30V, Drain to Source Resistance=103mR, Drain to Source Voltage (Vdss)=30V, Gate to Source Voltage (Vgs)=20V, Input Capacitance=388pF, Manufacturer="International Rectifier", Manufacturer Part Number=IRLML9301TRPBF, Max Operating Temperature=150°C, Max Power Dissipation=1.3W, Min Operating Temperature=-55°C, On-State Resistance=64MR, Package Quantity=1, Supplier Part Number 1=1829137, Threshold Voltage=-1.3V, Element Configuration=Single, Fall Time=15ns, Height=1.02mm, Lead Free="Lead Free", Length=3.04mm, Mount="Surface Mount", Nominal Vgs=-1.3V, Number of Elements=1, Number of Pins=3, Packaging="Tape and Reel", Power Dissipation=1.3W, Radiation Hardening=No, Rds On Max=64mR, REACH SVHC="No SVHC", Recovery Time=21ns, Rise Time=19ns, Supplier 1=Farnell, Turn-Off Delay Time=16ns, Turn-On Delay Time=9.6ns, Width=1.4mm
R1 R2 R3 R4 R5 R6 R7 R8 R9 R10 R11 R12 R13 R14 R15 R16 R17 R18 R19 R20 R22 R23 R24 R25 R26 R27 R28 R29 R30 R31 R32 R33 R34 R35 R36 R37 R38: "Resistor", LatestRevisionDate=17-Jul-2002, LatestRevisionNote="Re-released for DXP Platform.", PackageReference=AXIAL-0.3, Published=8-Jun-2000, Publisher="Altium Limited"
  R1 R2 R3 R6 R7 R10 R11 R14 R15 R16 R17 R18 R19 R20 R22 R23 R24 R25 R26 R27 R28 R29 R30 R31 R32 R33 R34 R35 R36 R37 R38: PackageDescription="Axial Device, Thru-Hole; 2 Leads; 0.3 in Pin Spacing"
R21: library part 10K/R0603/1%, "RES SMD 10K OHM 1% 1/10W 0603", Manufacturer=Yageo, Manufacturer Part Number=RC0603FR-0710KL, Operating Temperature="-55°C ~ 155°C", Package / Case="0603 (1608 Metric)", Power (Watts)="0.1W, 1/10W", Resistance (Ohms)=10k, Supplier Device Package=0603, Supplier Part Number 1=311-10.0KHRTR-ND, Temperature Coefficient=±100ppm/°C, Tolerance=±1%, Category=Resistors, ComponentLink1Description=http://www.yageo.com/NewPortal/yageodocoutput?fileName=/pdf/R-Chip/PYu-RC_Group_51_RoHS_L_3.pdf, ComponentLink1URL=http://www.yageo.com/NewPortal/yageodocoutput?fileName=/pdf/R-Chip/PYu-RC_Group_51_RoHS_L_3.pdf, Composition="Thick Film", Features="Moisture Resistant", Height="0.022\" (0.55mm)", Number of Terminations=2, Packaging="Tape & Reel (TR)", Pricing 1="5000=0.00167, 10000=0.00145, 25000=0.00128, 50000=0.00117, 125000=0.00115 (USD)", RoHS="RoHS Compliant", Size / Dimension="0.063\" L x 0.031\" W (1.60mm x 0.80mm)", Stock 1=11440000, Supplier 1=Digi-Key
U1: "3A, 1.5HZ, 28V Step-Down Converter"
U6: "Current Sensor"
U7: "Stand-Alone Ethernet Controller with SPI Interface"
U8: "74HC4050 Non-Inv Hex Logic Down Coverter"
"USB 1": library part USB_MH, "USB conector"
Y1 Y2 Y3: library part XTAL, "Crystal Oscillator", LatestRevisionDate=17-Jul-2002, LatestRevisionNote="Re-released for DXP Platform.", PackageDescription="Crystal, Thru-Hole; 2 Leads; Body 3.1 x 8.2 mm (Dia.xH)", PackageReference=R38, Published=8-Jun-2000, Publisher="Altium Limited"
L1 L2 L3: Code_IEC=1005, Code_JEITA=0402, LatestRevisionDate=29-May-2009, LatestRevisionNote="IPC-7351 Footprint Added.", PackageDescription="Chip Inductor", PackageReference=0402-A, Published=8-Jun-2000, Publisher="Altium Limited"

## Via types
v1: diameter 1, hole 0.7, Top Layer to Bottom Layer, tented both sides, 423 vias
v2: diameter 0.7, hole 0.4, Top Layer to Bottom Layer, tented both sides, 34 vias

## Nets (pads, with @x,y where several pads share a name; then routed paths per layer and width w, separated by ;. In a path a pad name is that pad's centre, name@x,y a point inside that pad or via, vN(x,y) a via of type N, cw(c..) or ccw(c..) an arc to the next point about the centre after c; other vN are vias at no path point)
3V3: C8.2 C9.1 C10.1 C11.2 C16.1 C23.2 L1.1 L3.2 P2.1 Q2.2 R1.1 R2.1 R14.2 R17.2 R23.2 R28.1 R31.2 R32.2 R34.2 R35.2 U5.1 U5.13 U5.19 U5.32 U5.48 U5.64 U7.15 U7.19 U7.20 U7.25 U7.28 U8.1 | length 94.9
  Top Layer w0.3: 16.967,17.179 U5.13@19.05,17.179 ; v1(18.567,24.536) 18.567,24.347 19.05,23.864 U5.1@19.05,23.179 ; v1(19.837,25.578) 20.386,25.029 U5.64@20.9,25.029 ; C10.1@20.066,6.145 21.487,6.145 21.915,6.573 21.915,12.439 21.9,12.453 U5.19@21.9,13.829 ; U5.32@28.4,13.829 31.18,13.829 32.131,12.878 32.131,6.858 31.344,6.071 29.665,6.071 C16.1@29.591,6.145 ; U5.48@30.25,23.179 30.899,23.179 30.899,23.752 v1(31.571,24.424)
  Top Layer w0.5: v1(27.889,48.235) 27.985,48.139 27.985,47.442 28.437,46.99 U8.1@29.21,46.99 ; v1(40.107,12.954) 40.139,12.987 41.548,12.987 R34.2@41.58,13.019 ; v1(40.132,10.693) 40.176,10.65 41.536,10.65 R35.2@41.58,10.606 ; R32.2@48.057,43.956 48.164,44.064 48.164,45.751 v1(48.26,45.847) ; v1(50.546,45.847) 50.571,45.822 50.571,43.982 C23.2@50.597,43.956 ; v1(53.086,45.847) 53.182,45.751 53.182,43.411 L3.2@53.285,43.307 ; v1(55.88,24.663) 55.976,24.568 55.976,23.23 U7.28@56.026,23.179 ; U7.15@56.642,6.669 57.324,6.669 57.867,6.125 57.867,5.52 v1(57.963,5.424) ; U7.19@56.642,11.749 56.663,11.77 58.269,11.77 58.818,12.319 v1(58.953,12.319) ; U7.25@56.642,19.369 54.951,19.369 54.305,20.015 54.305,22.581 54.904,23.179 U7.28@56.026,23.179 ; U7.28@56.642,23.179 U7.28@56.026,23.179 ; Q2.2@69.53,9.08 69.53,8.655 69.58,8.605 70.005,8.605 70.132,8.478 70.669,8.478 v1(70.764,8.382) ; R17.2@69.85,6.35 69.875,6.325 71.298,6.325 v1(71.323,6.299)
  Top Layer w1: v1(6.223,38.014) R1.1@6.223,39.689 ; C9.1@10.16,19.369 v1(11.835,19.369) 13.219,19.369 15.409,17.179 16.967,17.179 ; v1(20.066,4.47) C10.1@20.066,6.145 ; v1(21.59,32.934) C8.2@21.59,34.609 ; v1(29.591,4.47) C16.1@29.591,6.145 ; v1(39.905,52.389) R2.1@41.58,52.389 ; C11.2@42.15,25.832 v1(43.825,25.832) ; v1(71.12,59.274) R28.1@71.12,60.949
  Bottom Layer w1: v1(11.1,8.28) R23.2@11.1,10.479 ; R31.2@18.72,42.229 18.72,44.169 19.306,44.755 v1(20.625,44.755) ; L1.1@40.44,59.715 40.465,59.69 L1.1@40.64,59.69 ; v1(53.264,69.317) R14.2@53.264,72.212
  Bottom Layer w1.4: v1(39.905,52.389) 40.64,53.124 L1.1@40.64,59.69
  other v1: 56.998,24.663
BOOT0: R20.2 U5.60 | length 9.4
  Top Layer w0.3: U5.60@22.9,25.029 22.9,26.111 22.9,29.352 25.933,32.385 R20.2@25.933,33.211
BOOT1: R24.2 U5.28 | length 6.5
  Top Layer w0.3: R24.2@24.679,8.02 24.679,9.794 26.4,11.516 26.4,12.7 U5.28@26.4,13.829
CONTROL_LCD: Q2.1 R17.1 U5.21 U5.24 | length 66.6
  Top Layer w0.3: U5.24@24.4,13.829 24.4,15.199 24.206,15.392 23.076,15.392 22.9,15.217 U5.21@22.9,13.829 22.9,12.7 22.9,3.567 24.13,2.337 66.624,2.337 68.25,3.963 R17.1@68.25,6.35
  Top Layer w0.5: Q2.1@67.63,9.08 67.63,7.833 68,7.463 68,6.6 R17.1@68.25,6.35
CS_ETH: R34.1 U5.38 U7.9 | length 28.8
  Top Layer w0.3: v2(26.772,17.729) 26.88,17.729 27.33,18.179 U5.38@30.25,18.179 ; v2(40.513,14.834) 41.515,14.834 42.83,13.519 43.18,13.169 R34.1@43.18,13.019 U7.9@46.99,13.019
  Bottom Layer w0.3: v2(26.772,17.729) 26.111,17.069 26.111,15.9 28.219,13.792 31.547,13.792 37.109,13.792 38.151,14.834 v2(40.513,14.834)
CS_LCD: P1.3 U5.33 | length 59.8
  Top Layer w0.3: U5.33@30.25,15.679 32.556,15.679 33.122,15.113 v2(35.128,15.113) ; v2(60.604,8.814) 62.763,8.814 67.081,13.132 72.339,13.132 73.939,14.732 73.939,21.869 P1.3@76.2,24.13
  Bottom Layer w0.3: v2(35.128,15.113) 36.541,15.113 37.125,15.697 43.409,15.697 50.292,8.814 v2(60.604,8.814)
D/C_LCD: P1.5 U5.37 | length 46.5
  Top Layer w0.3: U5.37@30.25,17.679 34.011,17.679 34.696,18.364 v2(36.881,18.364)
  Bottom Layer w0.3: v2(36.881,18.364) 55.347,18.364 56.032,19.05 P1.5@76.2,19.05
DC5V_IN: "USB 1.1" C3.1 C4.1 D4.1 L2.2 Q1.1 R4.2 R16.2 R21.1 U4.4 U4.8 U6.8 | length 36.9
  Top Layer w0.5: R21.1@10.16,55.88 11.811,55.88 12.13,56.199 U4.4@13.97,56.199 ; Q1.1@15.081,52.219 15.097,52.235 15.097,53.197 v1(15.113,53.213) ; U4.8@18.77,60.009 18.826,60.009 18.872,60.055 v1(18.872,61.519) ; U6.8@19.05,66.639 19.05,64.651 19.406,64.296 v1(19.406,64.16) ; v1(44.323,71.349) 44.323,75.209 L2.2@44.363,75.249 ; C4.1@46.99,76.519 47.003,76.532 47.003,78.118 v1(47.015,78.13) ; v1(49.403,78.13) 49.467,78.067 49.467,76.583 C3.1@49.53,76.519
  Top Layer w1: v1(10.566,47.93) 10.639,47.93 11.497,47.072 13.398,47.072 D4.1@13.48,46.99 ; 72.39,66.359 v1(72.39,69.85)
  Bottom Layer w1: R4.2@40.437,73.685 41.986,73.685 v1(44.323,71.349) ; v1(49.403,78.13) 49.403,76.81 50.165,76.048 52.807,76.048 54.675,77.916 R16.2@55.88,77.916
  other v1: 10.414,53.213 11.887,53.213 13.487,53.213 10.414,54.585 11.887,54.585 13.487,54.585 15.113,54.585
DC9V: D1.2 U6.1 U6.2 | length 7.7
  Top Layer w0.6: U6.2@17.78,71.439 U6.1@19.05,71.439 19.05,71.399 19.831,71.399 20.313,71.882 v1(20.422,71.882) ; v1(18.567,78.486) 18.644,78.409 18.644,77.084 19.208,76.519 D1.2@19.54,76.519 19.781,76.519 20.345,75.954 20.345,74.88 v1(20.422,74.803)
  other v1: 20.422,73.343 18.542,74.803 20.447,78.486
DC9V_IN: R5.2 U2.2 U6.3 U6.4 | length 7.6
  Top Layer w0.5: v1(14,71.45) 15.229,71.45 U6.4@15.24,71.439 U6.3@16.51,71.439 ; v1(25.222,76.784) 25.222,76.649 25.4,76.471 R5.2@25.4,74.93 ; v1(26.975,75.235) 27.07,75.139 27.07,74.428 27.519,73.979 U2.2@29.21,73.979
  other v1: 14,73.482 15.9,73.482 26.975,76.784
FB: R4.1 R8.2 U2.5 | length 7.7
  Top Layer w0.5: U2.5@34.96,71.439 34.96,70.78 v1(35.433,70.307)
  Bottom Layer w0.3: R8.2@38.837,71.145 R4.1@38.837,73.685
  Bottom Layer w0.5: v1(35.433,70.307) 37.998,70.307 38.437,70.745 38.587,70.745 38.837,70.995 R8.2@38.837,71.145